# Altium PCB ASCII-laptop-lidsense1.PcbDoc
Units mil, origin at the board's own origin, x right, y up, seen from the top; angles counter-clockwise.
Board outline 629.92 x 472.44 mil, 2 copper layers (Top Layer, Bottom Layer), stack 62.8 mil thick; 4 components, 3 nets, 12 pads, 0 vias.
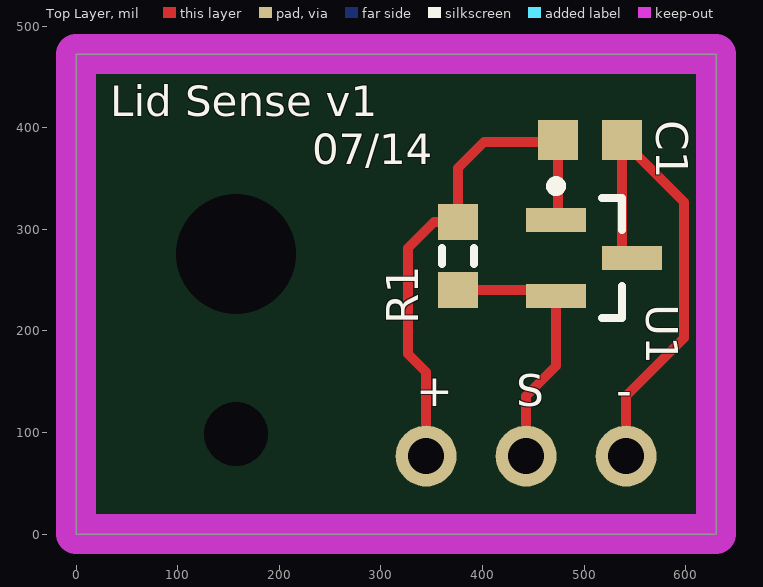
[diagram p0: Top Layer view]
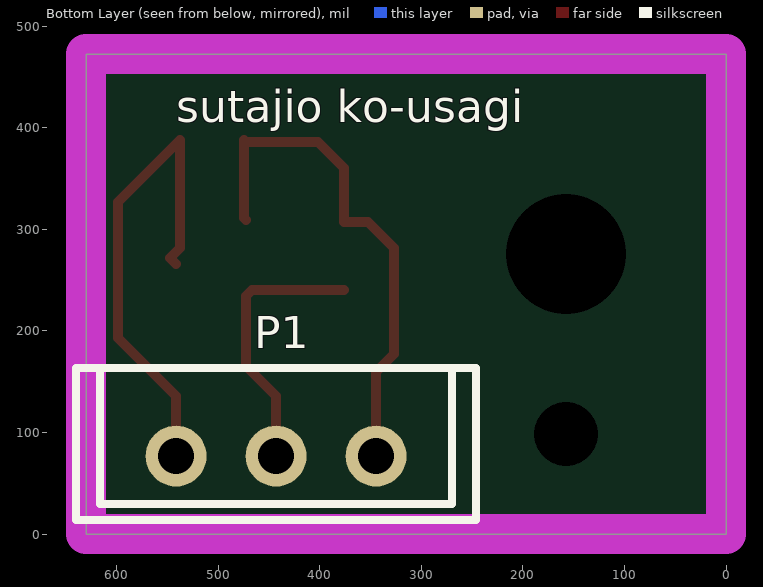
[diagram p1: Bottom Layer view, seen from below]

## Layer stack, top to bottom
Top Solder: solder mask 0.4, Solder Resist, Dk 3.5
Top Layer: signal copper 1.4
Dielectric 1: dielectric 60, FR-4, Dk 4.8
Bottom Layer: signal copper 1.4
Bottom Solder: solder mask 0.4, Solder Resist, Dk 3.5

## Board outline
0,0 629.92,0 629.92,472.44 0,472.44

## Design rules (kind name [scope] priority, off if disabled: settings)
AssemblyTestPointUsage [All] p0: scope1count=1 scope1_0_kind=Board scope1_0_value=Board scope2count=1 scope2_0_kind=Board scope2_0_value=Board commentlength=0
AssemblyTestpoint [All] p0: scope1count=1 scope1_0_kind=Board scope1_0_value=Board scope2count=1 scope2_0_kind=Board scope2_0_value=Board commentlength=0
Clearance [All] p0: scope1count=1 scope1_0_kind=Board scope1_0_value=Board scope2count=1 scope2_0_kind=Board scope2_0_value=Board commentlength=0 gap=6
Clearance Clearance_NPTH [All] p0 off: scope1count=1 scope1_0_kind=Board scope1_0_value=Board scope2count=1 scope2_0_kind=Board scope2_0_value=Board commentlength=60 gap=12 // Protel DXP Scope 1 Expression Was: PadIsPlated = 'False'
Clearance Clearance_NPTH [PadIsPlated = 'False'] p1: gap=12
Clearance [All] p2: gap=6
ComponentClearance [All] p0: scope1count=1 scope1_0_kind=Board scope1_0_value=Board scope2count=1 scope2_0_kind=Board scope2_0_value=Board commentlength=0 gap=10 collisioncheckmode=3
DiffPairsRouting [All] p0: scope1count=1 scope1_0_kind=Board scope1_0_value=Board scope2count=1 scope2_0_kind=Board scope2_0_value=Board commentlength=0
DiffPairsRouting [All] p1: maxlimit=7 minlimit=6.2 mostfreqgap=6.2 toplayer_minwidth=10 toplayer_maxwidth=37 toplayer_prefwidth=37 bottomlayer_minwidth=10 bottomlayer_maxwidth=37 bottomlayer_prefwidth=37 maxuncoupledlength=500
FabricationTestPointUsage [All] p0: scope1count=1 scope1_0_kind=Board scope1_0_value=Board scope2count=1 scope2_0_kind=Board scope2_0_value=Board commentlength=0 valid=0 allowmultiple=FALSE
FabricationTestpoint [All] p0: scope1count=1 scope1_0_kind=Board scope1_0_value=Board scope2count=1 scope2_0_kind=Board scope2_0_value=Board commentlength=0 side=3 testpointundercomponent=TRUE minsize=40 maxsize=100 preferedsize=60 minholesize=0 maxholesize=40 preferedholesize=32 testpointgrid=1
FanoutControl Fanout_BGA [All] p0 off: scope1count=1 scope1_0_kind=Board scope1_0_value=Board scope2count=1 scope2_0_kind=Board scope2_0_value=Board commentlength=69 // Protel DXP Scope 1 Expression Was: IsBGA   Fanout_BGA (Default Rule)
FanoutControl Fanout_LCC [All] p0 off: scope1count=1 scope1_0_kind=Board scope1_0_value=Board scope2count=1 scope2_0_kind=Board scope2_0_value=Board commentlength=69 // Protel DXP Scope 1 Expression Was: IsLCC   Fanout_LCC (Default Rule)
FanoutControl Fanout_SOIC [All] p0 off: scope1count=1 scope1_0_kind=Board scope1_0_value=Board scope2count=1 scope2_0_kind=Board scope2_0_value=Board commentlength=71 // Protel DXP Scope 1 Expression Was: IsSOIC   Fanout_SOIC (Default Rule)
FanoutControl Fanout_Small [All] p0 off: scope1count=1 scope1_0_kind=Board scope1_0_value=Board scope2count=1 scope2_0_kind=Board scope2_0_value=Board commentlength=84 // Protel DXP Scope 1 Expression Was: (CompPinCount < 5)   Fanout_Small (Default Rule)
FanoutControl Fanout_Default [All] p0: scope1count=1 scope1_0_kind=Board scope1_0_value=Board scope2count=1 scope2_0_kind=Board scope2_0_value=Board commentlength=30 // Fanout_Default (Default Rule)
Height [All] p0: scope1count=1 scope1_0_kind=Board scope1_0_value=Board scope2count=1 scope2_0_kind=Board scope2_0_value=Board commentlength=0
HoleSize [All] p0: scope1count=1 scope1_0_kind=Board scope1_0_value=Board scope2count=1 scope2_0_kind=Board scope2_0_value=Board commentlength=0 absolutevalues=TRUE maxlimit=250 minlimit=1 maxpercent=80.000 minpercent=20.000
HoleSize [All] p1: absolutevalues=TRUE maxlimit=250 minlimit=1 maxpercent=80.000 minpercent=20.000
HoleToHoleClearance [All] p0: scope1count=1 scope1_0_kind=Board scope1_0_value=Board scope2count=1 scope2_0_kind=Board scope2_0_value=Board commentlength=0
LayerPairs [All] p0: scope1count=1 scope1_0_kind=Board scope1_0_value=Board scope2count=1 scope2_0_kind=Board scope2_0_value=Board commentlength=0 enforce=TRUE
MinimumSolderMaskSliver [All] p0: scope1count=1 scope1_0_kind=Board scope1_0_value=Board scope2count=1 scope2_0_kind=Board scope2_0_value=Board commentlength=0
NetAntennae [All] p0: scope1count=1 scope1_0_kind=Board scope1_0_value=Board scope2count=1 scope2_0_kind=Board scope2_0_value=Board commentlength=0
PasteMaskExpansion [All] p0: scope1count=1 scope1_0_kind=Board scope1_0_value=Board scope2count=1 scope2_0_kind=Board scope2_0_value=Board commentlength=0 expansion=0
PlaneClearance [All] p0: scope1count=1 scope1_0_kind=Board scope1_0_value=Board scope2count=1 scope2_0_kind=Board scope2_0_value=Board commentlength=0 clearance=20
PlaneConnect [All] p0: scope1count=1 scope1_0_kind=Board scope1_0_value=Board scope2count=1 scope2_0_kind=Board scope2_0_value=Board commentlength=0 planeconnectstyle=Relief reliefexpansion=20 reliefentries=4 reliefconductorwidth=10 reliefairgap=10
PolygonConnect [All] p0: scope1count=1 scope1_0_kind=Board scope1_0_value=Board scope2count=1 scope2_0_kind=Board scope2_0_value=Board commentlength=0 connectstyle=Relief reliefconductorwidth=20 reliefentries=4 polygonreliefangle="90 Angle"
PolygonConnect [All] p1: connectstyle=Relief reliefconductorwidth=20 reliefentries=4 polygonreliefangle="90 Angle" airgapwidth=10
RoomDefinition lidsense [All] p0 off: scope1count=1 scope1_0_kind=ComponentClass scope1_0_value=lidsense scope2count=1 scope2_0_kind=Board scope2_0_value=Board commentlength=0 region_x1=24744045 region_y1=15196820 region_x2=25099478 region_y2=20334605 confinementstyle=ConfineIn
RoomDefinition lidsense [InComponentClass('lidsense')] p1 off: confinementstyle=ConfineIn formatcopy=TRUE lockcomponents=FALSE outline 675.09,57.38 710.63,57.38 710.63,571.16 675.09,571.16
RoutingCorners [All] p0: scope1count=1 scope1_0_kind=Board scope1_0_value=Board scope2count=1 scope2_0_kind=Board scope2_0_value=Board commentlength=0 cornerstyle=45-Degree minsetback=100 maxsetback=100
RoutingLayers [All] p0: scope1count=1 scope1_0_kind=Board scope1_0_value=Board scope2count=1 scope2_0_kind=Board scope2_0_value=Board commentlength=0 top layer=Automatic bottom layer=Automatic
RoutingPriority [All] p0: scope1count=1 scope1_0_kind=Board scope1_0_value=Board scope2count=1 scope2_0_kind=Board scope2_0_value=Board commentlength=0
RoutingTopology [All] p0: scope1count=1 scope1_0_kind=Board scope1_0_value=Board scope2count=1 scope2_0_kind=Board scope2_0_value=Board commentlength=0 topology=Shortest
RoutingVias [All] p0: scope1count=1 scope1_0_kind=Board scope1_0_value=Board scope2count=1 scope2_0_kind=Board scope2_0_value=Board commentlength=0 holewidth=15 width=30 viastyle="Through Hole" minholewidth=15 minwidth=30 maxholewidth=15 maxwidth=30
RoutingVias [All] p1: holewidth=15 width=30 viastyle="Through Hole" minholewidth=15 minwidth=30 maxholewidth=15 maxwidth=30
ShortCircuit [All] p0: scope1count=1 scope1_0_kind=Board scope1_0_value=Board scope2count=1 scope2_0_kind=Board scope2_0_value=Board commentlength=0 allowed=FALSE
SilkToBoardRegionClearance [All] p0 off: scope1count=1 scope1_0_kind=Board scope1_0_value=Board scope2count=1 scope2_0_kind=Board scope2_0_value=Board commentlength=0
SilkToBoardRegionClearance [All] p1 off:
SilkToSilkClearance [All] p0 off: scope1count=1 scope1_0_kind=Board scope1_0_value=Board scope2count=1 scope2_0_kind=Board scope2_0_value=Board commentlength=0
SilkToSilkClearance [All] p1 off: silktosilkclearance=10
SilkToSolderMaskClearance [All] p0 off: scope1count=1 scope1_0_kind=Board scope1_0_value=Board scope2count=1 scope2_0_kind=Board scope2_0_value=Board commentlength=44 // Protel DXP Scope 1 Expression Was: IsPad
SilkToSolderMaskClearance [IsPad] p1 off: minsilkscreentomaskgap=10 clearancetoexposedcopper=TRUE
SolderMaskExpansion [All] p0: scope1count=1 scope1_0_kind=Board scope1_0_value=Board scope2count=1 scope2_0_kind=Board scope2_0_value=Board commentlength=0 expansion=3
SolderMaskExpansion [All] p1: expansion=3
UnRoutedNet [All] p0: scope1count=1 scope1_0_kind=Board scope1_0_value=Board scope2count=1 scope2_0_kind=Board scope2_0_value=Board commentlength=0
Width [All] p0: scope1count=1 scope1_0_kind=Board scope1_0_value=Board scope2count=1 scope2_0_kind=Board scope2_0_value=Board commentlength=0 maxlimit=100 minlimit=6 preferedwidth=10
Width [All] p1: maxlimit=100 minlimit=6 preferedwidth=10 minimp=50.000000 maximp=50.000000 favimp=50.000000
24 further rules are at their usual default settings.

## Components (designator, comment, footprint, x,y, rotation, side; value= is the part's Value field where it differs from the comment)
C1 "1.0uF, 25V, 20% X5R" CAPC1608N 505.91,387.8 r0 top
P1 "JST B3B-EH-A" JST_B3B_EH_A 344.49,76.77 r0 bottom
R1 "47k, 1%" RESC1608N 375.98,273.62 r270 top
U1 "TCS20DLR" SOT23-3N 509.84,271.65 r0 top

## Footprints (in the part's own frame and the unit in brackets; to place one, negate y for a bottom-side part, rotate by r counter-clockwise, add the part's x,y. Pads: shape width x height; smd on the part's side, far side on the other; paste and mask are expansions set on the pad)
CAPC1608N [mm] "Chip Capacitor, Body 1.6x0.8mm, IPC Medium Density"
  rect 1x1 smd: 1(-0.8,0) 2(0.8,0)
JST_B3B_EH_A [mil] "3-pin 2.5mm low cost connector"
  round 60 hole 35.43: 1(0,0) 2(98.43,0) 3(196.85,0)
  silkscreen extent -98,-87 295,63
RESC1608N [mm] "Chip Resistor, Body 1.6x0.8mm, IPC Medium Density"
  rect 0.9x1 smd: 1(-0.85,0) 2(0.85,0)
  silkscreen extent -0.2,-0.4 0.2,0.4
SOT23-3N [mm] "SOT23, 3-Leads, Body 2.9x1.3mm, Pitch 0.95mm, Lead Span 2.5mm, IPC Medium Density"
  rect 1.5x0.6 smd: 1(-0.95,0.95) 2(-0.95,-0.95) 3(0.95,0)
  silkscreen extent -1.07,-1.5 0.7,1.92

## Part data
C1: library part "Cap Semi", "Capacitor (Semiconductor SIM Model)"
P1: library part "Header 3", "Header, 3-Pin"
R1: library part Res1, "Resistor"
U1: "Hall effect sensor, open collector output"

## Free pads (board coordinates)
  round 39.37 hole 62.99 unplated mask+39.37: 0(157.48,98.43)
  round 110.24 hole 118.11 unplated mask+39.37: 0(157.48,275.59)

## Nets (pads, with @x,y where several pads share a name; then routed paths per layer and width w, separated by ;. In a path a pad name is that pad's centre, name@x,y a point inside that pad or via, vN(x,y) a via of type N, cw(c..) or ccw(c..) an arc to the next point about the centre after c; other vN are vias at no path point)
GND: C1.2 P1.3 U1.3 | length 488.5
  Top Layer w10: P1.3 541.34,135.83 598.43,192.91 598.43,326.77 C1.2 537.4,281.5 U1.3 U1.3@541.34,265.75
KEY_COL3: P1.2 R1.2 U1.2 | length 268.6
  Top Layer w10: R1.2 466.54,240.16 U1.2 472.44,165.35 442.91,135.83 P1.2
P3.3V_DELAYED: C1.1 P1.1 R1.1 U1.1 | length 514.4
  Top Layer w10: P1.1 344.49,159.45 326.77,177.17 326.77,281.5 352.36,307.09 R1.1 375.98,360.24 401.57,385.83 472.44,385.83 C1.1 474.41,311.02 U1.1

## Keep-outs
Keep-Out Layer:
  the board outline again, w39.37

## Silkscreen, mask and mechanical layers (free items; w line width, h text height)
Top Overlay:
  text "Lid Sense v1" at 33.46,411.42 h30
  text "07/14" at 232.28,364.17 h30
  text "+" at 334.65,125.98 h31.5
  text "S" at 433.07,125.98 h31.5
  text "-" at 531.5,125.98 h31.5
Bottom Overlay:
  text "sutajio ko-usagi" at 541.34,405.51 h31.5
Mechanical 1:
  circle w0.39: c295.28,295.28 r55.12
  circle w0.39: c295.28,1397.64 r55.12
  circle w0.39: c1051.42,1604.33 r16.73
  circle w0.39: c1051.42,1879.92 r16.73
  circle w0.39: c1051.42,2529.53 r16.73
  circle w0.39: c1051.42,2805.12 r16.73
  lines w0.39: 822.52,2391.41 ccw(c817.92,2540.95) 822.52,2690.48
  lines w7.87: 141.73,295.28 196.85,295.28 295.28,295.28 ; 141.73,1397.64 196.85,1397.64 295.28,1397.64 ; 295.28,141.73 295.28,196.85 295.28,295.28 ; 295.28,448.82 295.28,393.7 295.28,295.28 ; 295.28,1244.1 295.28,1299.21 295.28,1397.64 ; 295.28,1551.18 295.28,1496.06 295.28,1397.64 ; 448.82,295.28 393.7,295.28 295.28,295.28 ; 448.82,1397.64 393.7,1397.64 295.28,1397.64 ; 822.52,2391.41 822.52,2145.01 0,2145.01 0,0 696.85,0 696.85,798.15 1361.39,1359.77 1361.39,3328.35 822.52,3328.35 822.52,2690.48 ; 936.26,1604.33 952.99,1604.33 1051.42,1604.33 ; 936.26,1879.92 952.99,1879.92 1051.42,1879.92 ; 936.26,2529.53 952.99,2529.53 1051.42,2529.53 ; 936.26,2805.12 952.99,2805.12 1051.42,2805.12 ; 1051.42,1489.17 1051.42,1505.91 1051.42,1604.33 ; 1051.42,1719.49 1051.42,1702.76 1051.42,1604.33 ; 1051.42,1764.76 1051.42,1781.5 1051.42,1879.92 ; 1051.42,1995.08 1051.42,1978.35 1051.42,1879.92 ; 1051.42,2414.37 1051.42,2431.1 1051.42,2529.53 ; 1051.42,2644.69 1051.42,2627.95 1051.42,2529.53 ; 1051.42,2689.96 1051.42,2706.69 1051.42,2805.12 ; 1051.42,2920.28 1051.42,2903.54 1051.42,2805.12 ; 1166.57,1604.33 1149.84,1604.33 1051.42,1604.33 ; 1166.57,1879.92 1149.84,1879.92 1051.42,1879.92 ; 1166.57,2529.53 1149.84,2529.53 1051.42,2529.53 ; 1166.57,2805.12 1149.84,2805.12 1051.42,2805.12
Mechanical 2:
  circle w7.87: c157.48,275.59 r59.06
  circle w7.87: c157.48,98.42 r31.5
  lines w7.87: 0,275.59 59.05,275.59 157.48,275.59 ; 27.56,98.42 59.05,98.42 157.48,98.42 ; 157.48,-31.5 157.48,0 157.48,98.42 ; 157.48,118.11 157.48,177.16 157.48,275.59 ; 157.48,228.35 157.48,196.85 157.48,98.42 ; 157.48,433.07 157.48,374.02 157.48,275.59 ; 287.4,98.42 255.91,98.42 157.48,98.42 ; 314.96,275.59 255.91,275.59 157.48,275.59 ; 0,0 0,472.44 629.92,472.44 629.92,0 0,0 ; 454.72,220.47 568.9,220.47 568.9,330.71 454.72,330.71 454.72,220.47
Mechanical 3:
  text "bunnie@kosagi.com" at 854.33,740.16 h31.5
  text "1.6mm thick FR-4" at 852.36,618.11 h31.5
  text "1 oz finished copper thickness" at 854.33,527.56 h31.5
  text "Matte black soldermask" at 854.33,438.98 h31.5
  text "HASL finish" at 854.33,360.24 h31.5
  text "White silkscreen" at 852.36,275.59 h31.5
  text "Please consult SMT factory for panelization instructions (v-score OK)" at 852.36,179.13 h31.5

## Text inside footprints (layer, text, board x,y; h text height)
R1: Mechanical 13 "Lid Sense V1" at 854.33,801.18 h31.5